# Altium PCB Snail-PCB.PcbDoc
Units mil, origin at the board's own origin, x right, y up, seen from the top; angles counter-clockwise.
Board outline 1496.06 x 944.88 mil, 2 copper layers (Component Side, Bottom Layer), stack 62.8 mil thick; 16 components, 11 nets, 58 pads, 28 vias.
Unrouted connection lines stored in the file: 5.
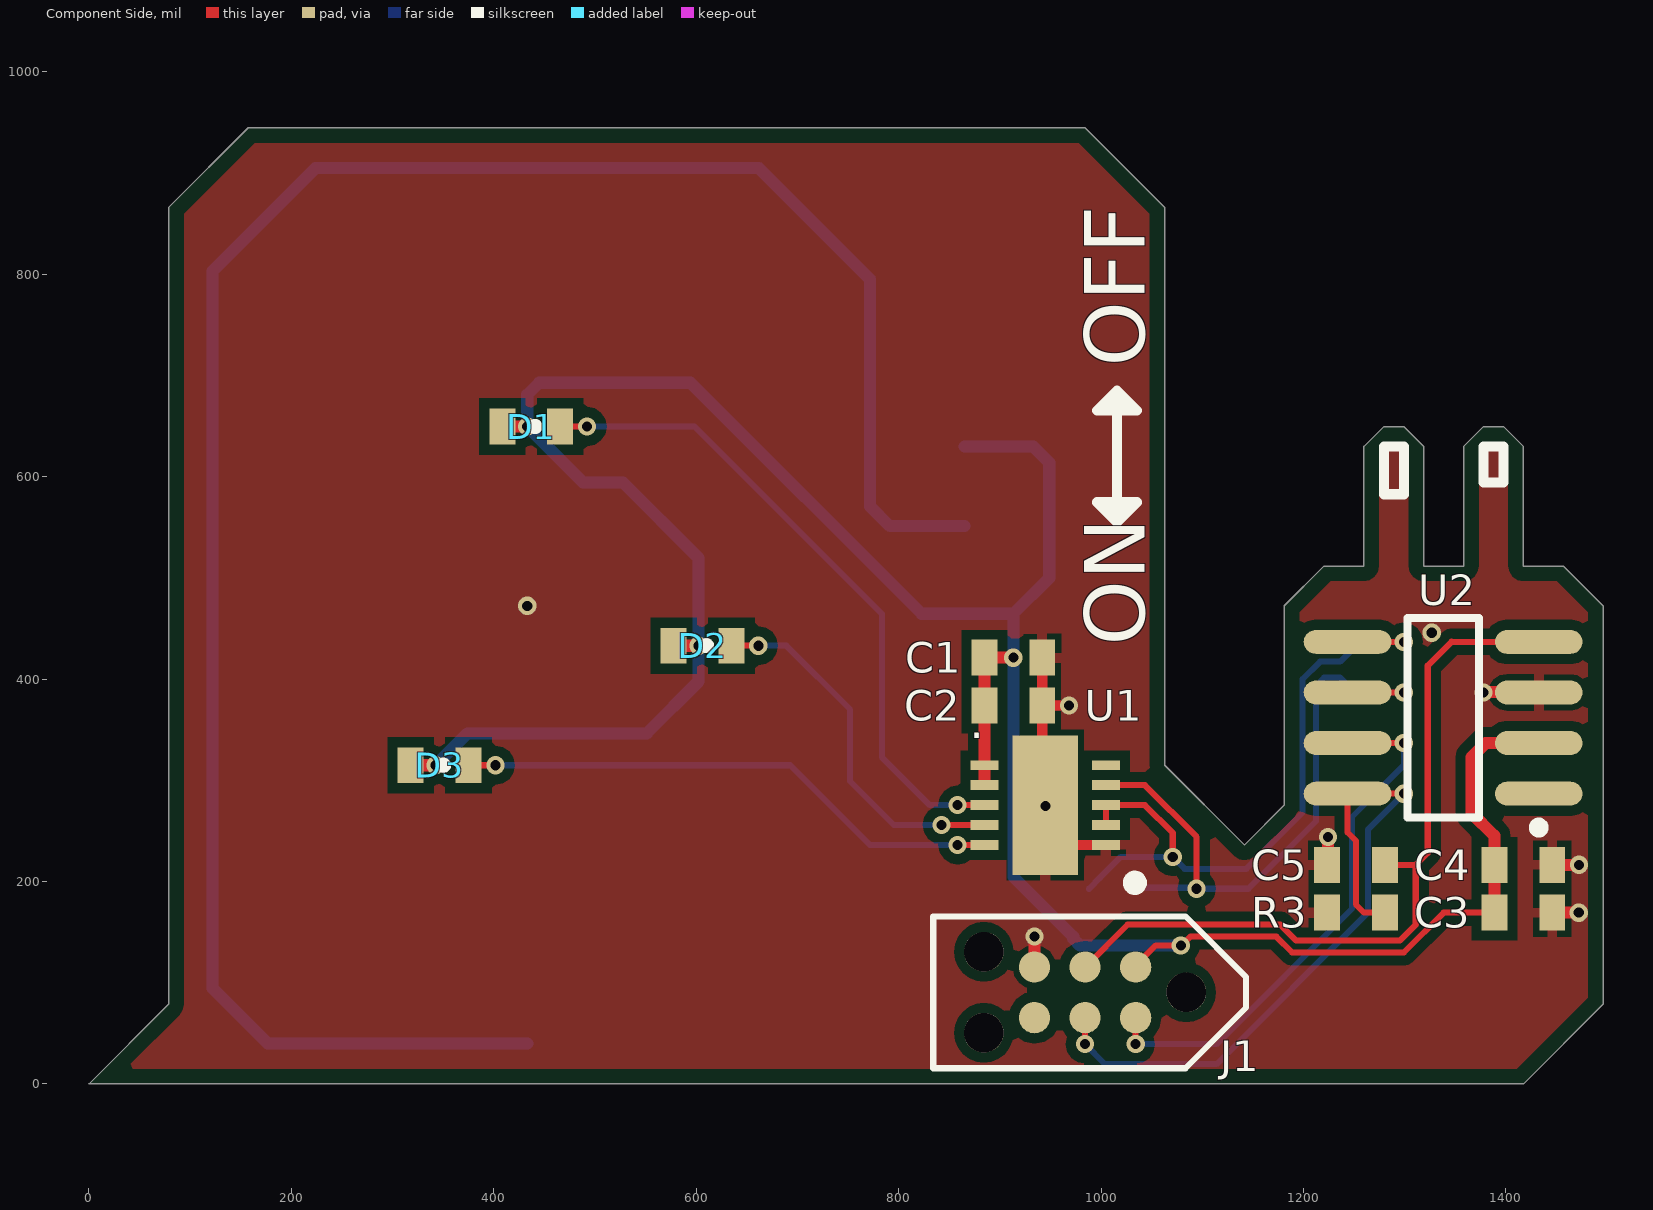
[diagram p0: Component Side view]
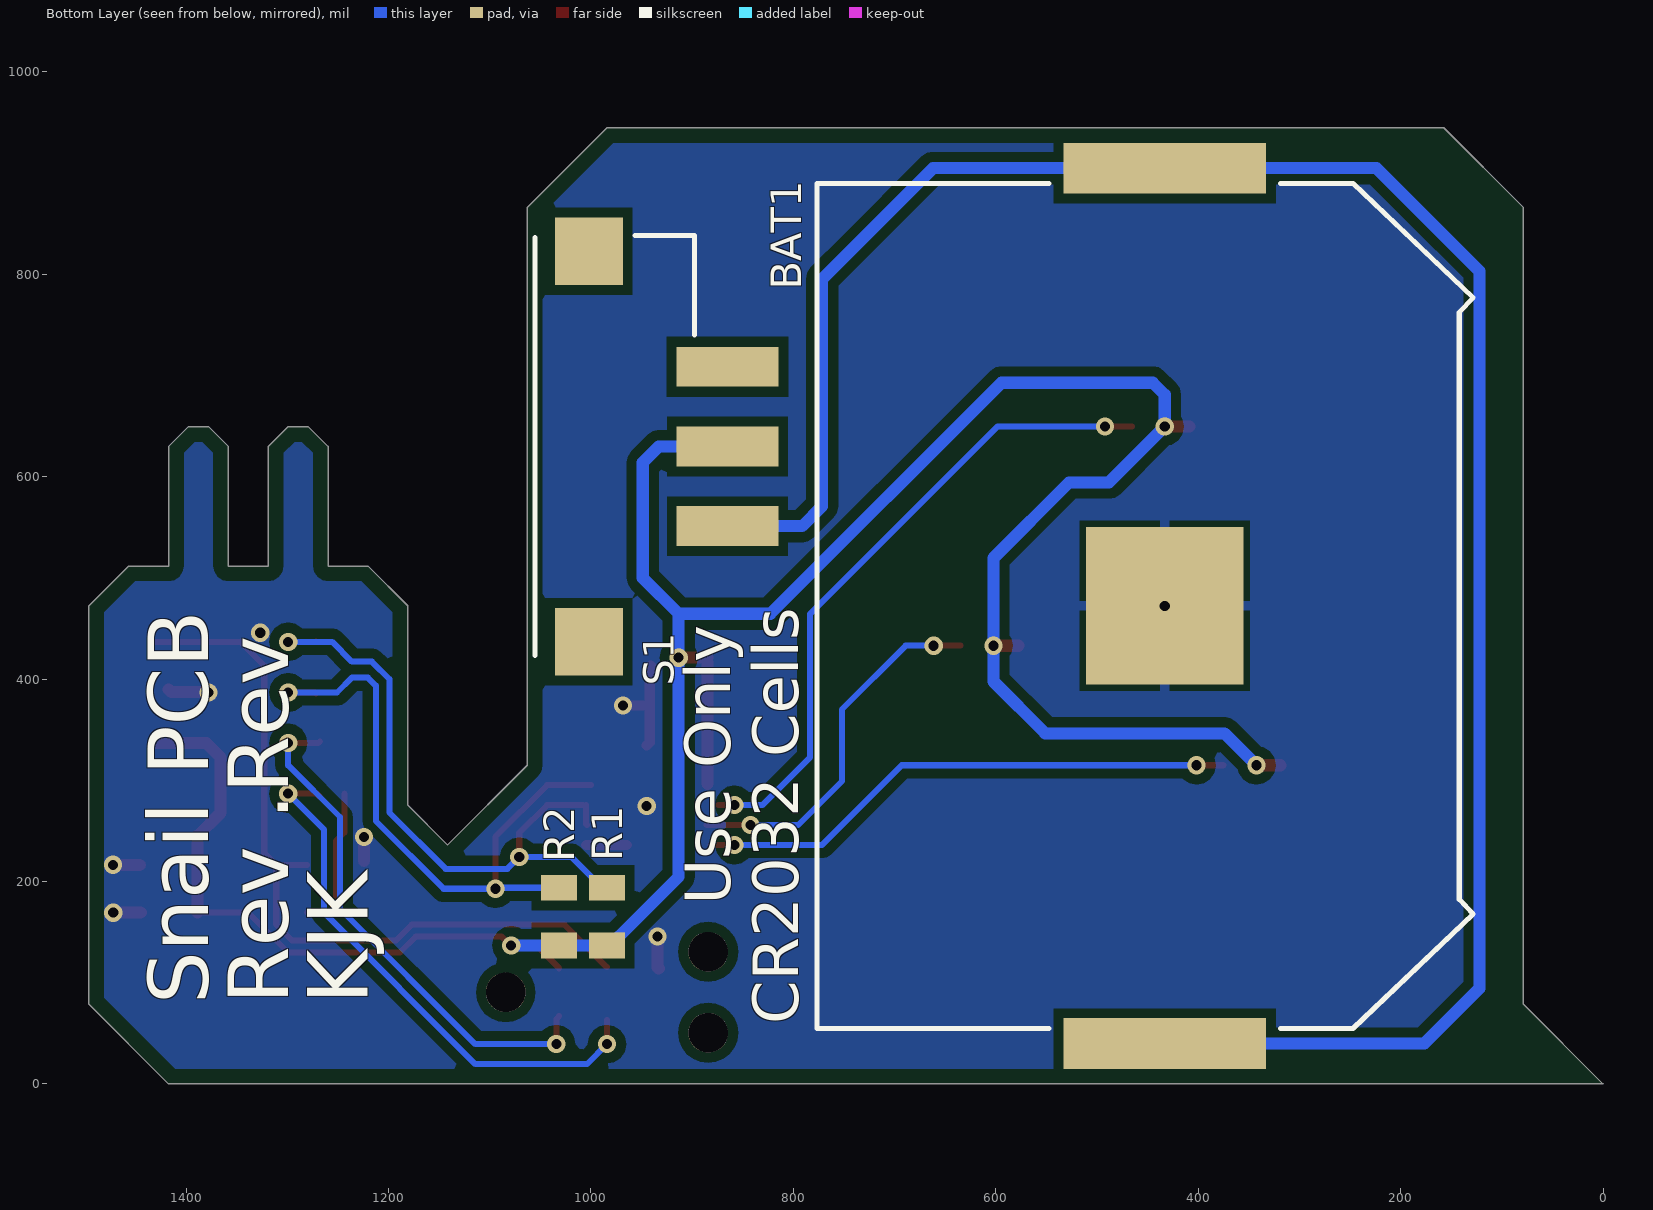
[diagram p1: Bottom Layer view, seen from below]
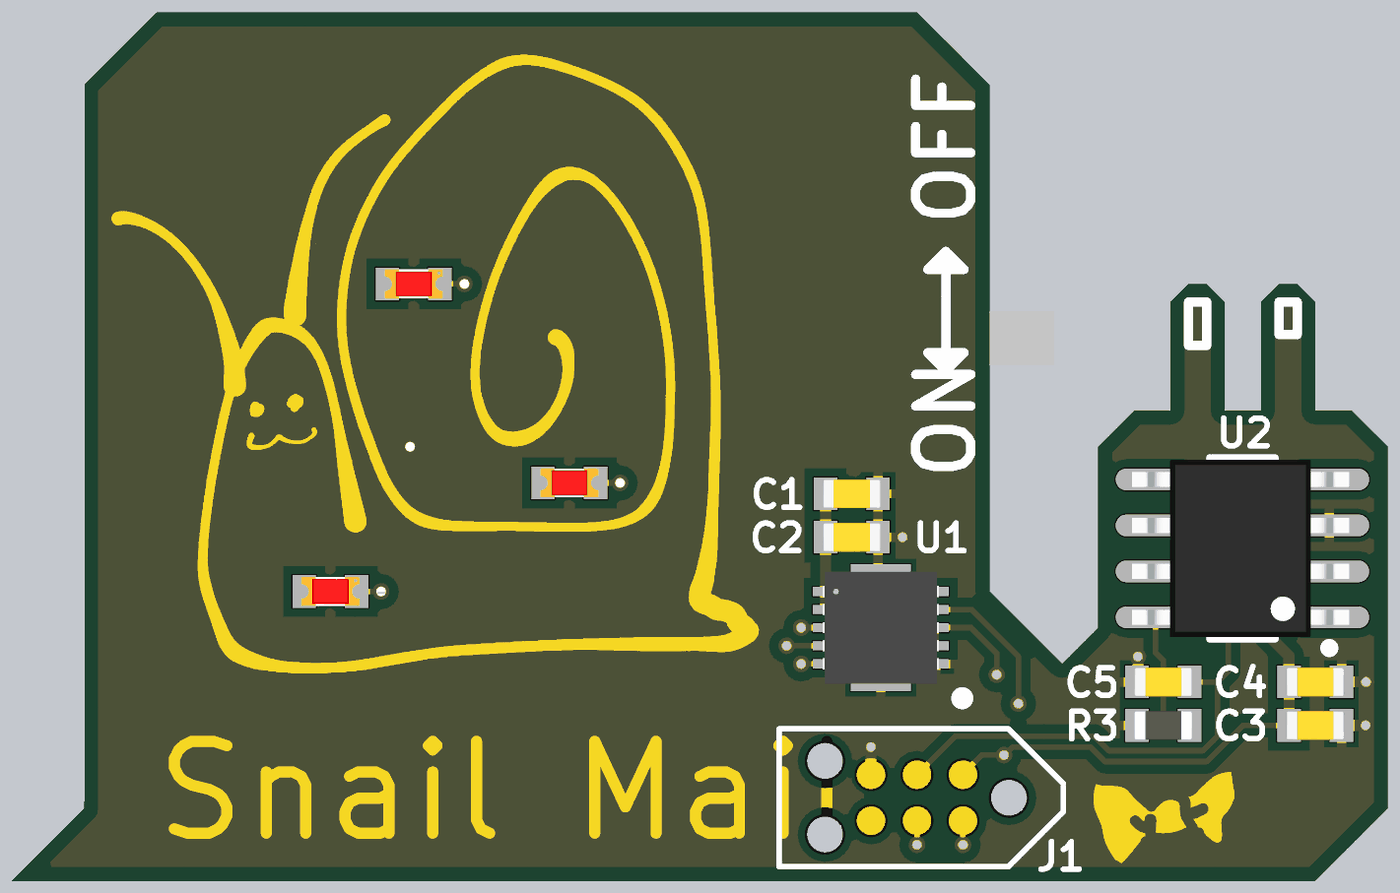
[diagram p2: 3D render of the assembled board from above, using the file's embedded part models]
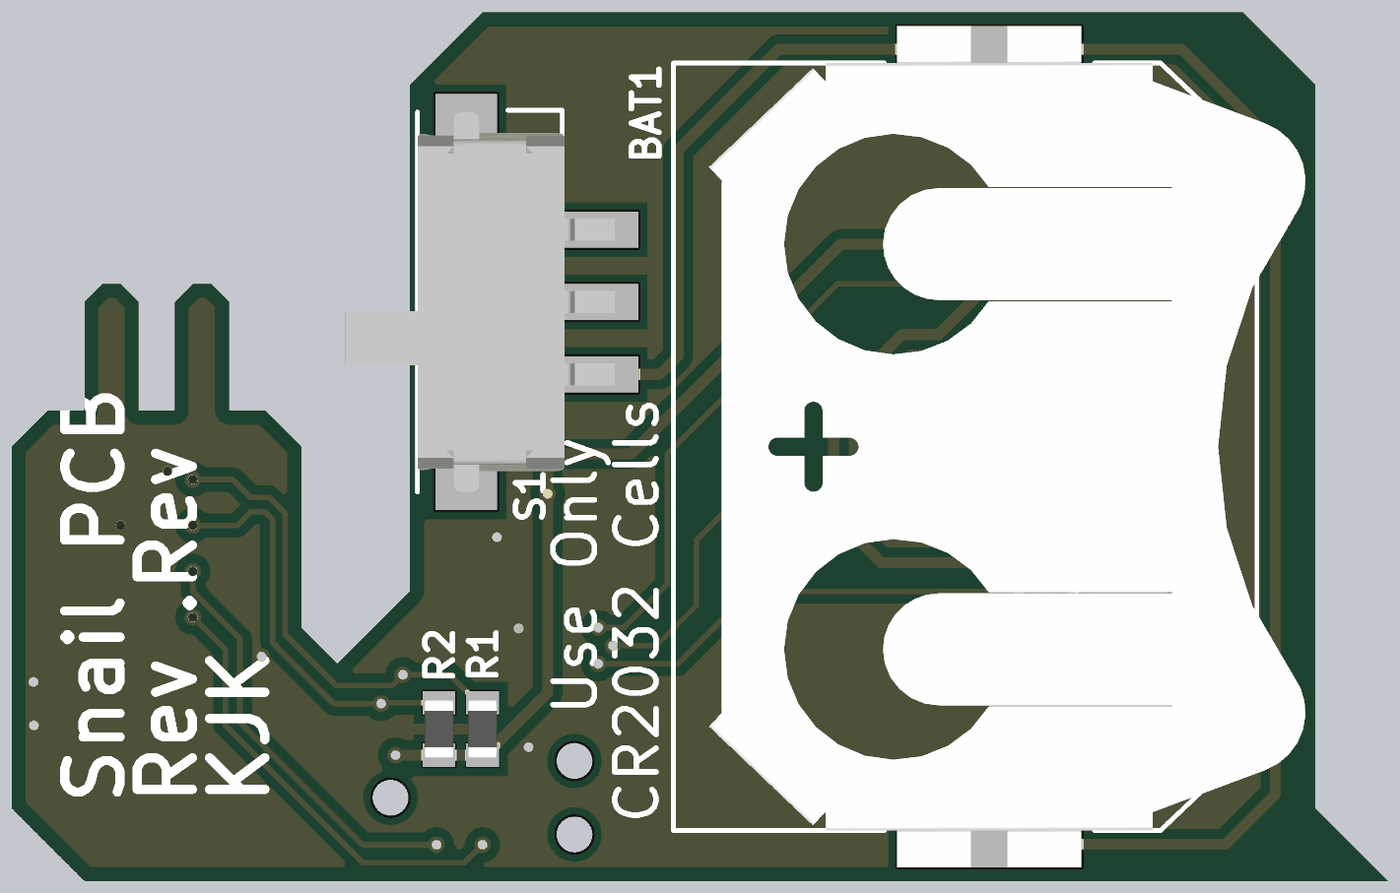
[diagram p3: 3D render of the assembled board from below, using the file's embedded part models]

## Layer stack, top to bottom
Top Solder: solder mask 0.4, Solder Resist, Dk 3.5
Component Side: signal copper 1.4
Dielectric 1: core 60, FR-4, Dk 4.2
Bottom Layer: signal copper 1.4
Solder Side: solder mask 0.4, Solder Resist, Dk 3.5

## Board outline
0,0 78.74,78.74 78.74,866.14 157.48,944.88 984.25,944.88 1062.99,866.14 1062.99,314.96 1141.73,236.22 1181.1,275.59 1181.1,472.44 1220.47,511.81 1259.84,511.81 1259.84,629.92 1279.53,649.61 1299.21,649.61 1318.9,629.92 1318.9,511.81 1358.27,511.81 1358.27,629.92 1377.95,649.61 1397.64,649.61 1417.32,629.92 1417.32,511.81 1456.69,511.81 1496.06,472.44 1496.06,78.74 1417.32,0

## Design rules (kind name [scope] priority, off if disabled: settings)
BoardOutlineClearance [All] p1: gap=15 ignorepadtopadclearanceinfootprint=FALSE
Clearance "Clearance Polygons" [InPolygon] p1: gap=10 ignorepadtopadclearanceinfootprint=FALSE except(0: Arc-Hole Track-Hole SMDPad-Hole THPad-Hole Via-Hole Fill-Hole Poly-Hole Region-Hole Text-Hole)
Clearance [All] p2: gap=5 ignorepadtopadclearanceinfootprint=FALSE except(0: Arc-Hole Track-Hole SMDPad-Hole THPad-Hole Via-Hole Fill-Hole Poly-Hole Region-Hole Text-Hole)
ComponentClearance "HM-TRP & UFL" [InComponent('X1') vs InComponent('U1')] p1: gap=0 collisioncheckmode=3 verticalgap=0 showdistances=FALSE
ComponentClearance [All] p2: gap=1 collisioncheckmode=3 verticalgap=1 showdistances=FALSE
DiffPairsRouting [All] p1: maxlimit=393.7 minlimit=5 mostfreqgap=8 toplayer_minwidth=5 toplayer_maxwidth=15 toplayer_prefwidth=8 bottomlayer_minwidth=5 bottomlayer_maxwidth=15 bottomlayer_prefwidth=8 maxuncoupledlength=500
HoleSize [All] p1: absolutevalues=TRUE maxlimit=265 minlimit=10 maxpercent=80.000 minpercent=20.000
HoleToHoleClearance [All] p1: gap=10 allowstackedmicrovias=FALSE
MinimumAnnularRing [All] p1: minimumring=4
MinimumSolderMaskSliver [All] p1: minsoldermaskwidth=0
PlaneClearance [All] p1: clearance=10
PlaneConnect [All] p1: planeconnectstyle=Relief reliefexpansion=4 reliefentries=4 reliefconductorwidth=6 reliefairgap=6
PolygonConnect "Via connect style" [isVia] p1: connectstyle=Direct reliefconductorwidth=10 reliefentries=4 polygonreliefangle="90 Angle" airgapwidth=10
PolygonConnect [All] p2: connectstyle=Relief reliefconductorwidth=10 reliefentries=4 polygonreliefangle="90 Angle" airgapwidth=6
RoutingCorners [All] p1: cornerstyle=45-Degree minsetback=49.21 maxsetback=49.21
RoutingVias [All] p1: holewidth=12 width=22 viastyle="Through Hole" minholewidth=10 minwidth=18 maxholewidth=100 maxwidth=114
SilkToSilkClearance [All] p1: silktosilkclearance=0
SilkToSolderMaskClearance [IsPad] p1: minsilkscreentomaskgap=1 clearancetoexposedcopper=TRUE
SolderMaskExpansion [All] p1: expansion=2.5 istentingtop=FALSE
Width GND [InNet('GND')] p1: maxlimit=30 minlimit=10 preferedwidth=20
Width Power [InNetClass('Power')] p2: maxlimit=40 minlimit=20 preferedwidth=30
Width 3V3 [InNetClass('3V3')] p3: maxlimit=30 minlimit=10 preferedwidth=20
Width [All] p4: maxlimit=400 minlimit=6 preferedwidth=8
20 further rules are at their usual default settings.

## Classes and differential pairs
component class -: C1 C2 C3 C4 C5 D1 D2 D3 R1 R2 R3

## Components (designator, comment, footprint, x,y, rotation, side; value= is the part's Value field where it differs from the comment)
BAT1 "3034TR" BAT_3034 433.07,472.44 r270 bottom locked
C1 "4.7uF" 0603 913.39,421.26 r0 top
C2 "0.1uF" 0603 913.39,374.02 r180 top
C3 "4.7uF" 0603 1417.32,169.29 r0 top
C4 "0.1uF" 0603 1417.32,216.54 r180 top
C5 "0.1uF" 0603 1251.97,216.54 r0 top
D1 "LED_Red" 0603_LED_Red 437.01,649.61 r0 top
D2 "LED_Red" 0603_LED_Red 606.3,433.07 r0 top
D3 "LED_Red" 0603_LED_Red 346.46,314.96 r0 top
J1 "TC2030-IDC-NL" TC2030-IDC-NL-FP 984.25,90.55 r270 top locked
R1 "10k" 0603 984.25,165.35 r90 bottom
R2 "10k" 0603 1031.5,165.35 r90 bottom
R3 "10k" 0603 1251.97,169.29 r180 top
S1 "SS312SAH4-R" SW_SS312SAH4-R 925.2,629.92 r180 bottom
U1 "IS31FL3193" DFN-10 944.88,275.59 r0 top
U2 "STM32G031J6M6" SOIC-8 1338.58,362.2 r180 top

## Footprints (in the part's own frame and the unit in brackets; to place one, negate y for a bottom-side part, rotate by r counter-clockwise, add the part's x,y. Pads: shape width x height; smd on the part's side, far side on the other; paste and mask are expansions set on the pad)
0603 [mm] "Chip Capacitor; Body 1.6 x 0.8 mm (LxW typ)"
  rect 0.65x0.9 smd mask+0.038: 1(-0.725,0) 2(0.725,0)
  body extent -0.8,-0.4 0.8,0.4, height 0.95
0603_LED_Red [mm]
  rect 0.65x0.9 smd mask+0.038: 1(-0.725,0) 2(0.725,0)
  silkscreen extent 0.04,-0.06 0.16,0.06, body extent -0.8,-0.4 0.8,0.4, height 0.6
BAT_3034 [mm]
  rect 1.27x5.08 smd: 1(-10.985,0) 1(10.985,0)
  rect 3.96x3.96 smd paste-3: 2(0,0)
  silkscreen extent -10.61,-8.73 10.61,7.74, body extent -11.62,-7.75 11.62,8.73, height 4.05
DFN-10 [mm]
  rect 0.7x0.25 smd mask+0.038: 1(-1.525,1) 2(-1.525,0.5) 3(-1.525,0) 4(-1.525,-0.5) 5(-1.525,-1) 6(1.525,-1) 7(1.525,-0.5) 8(1.525,0) 9(1.525,0.5) 10(1.525,1)
  rect 1.65x3.5 smd mask+0.038: 11(0,0)
  body extent -1.6,-1.55 1.6,1.55, height 0.81
SOIC-8 [mm]
  oval 2.2x0.6 smd mask+0.038: 1(-2.387,1.914) 2(-2.387,0.644) 3(-2.387,-0.626) 4(-2.387,-1.896) 5(2.413,-1.896) 6(2.413,-0.626) 7(2.413,0.644) 8(2.413,1.914)
  silkscreen extent -2.51,-2.49 0.91,2.89, body extent -2.93,-2.44 3.07,2.46, height 1.75
SW_SS312SAH4-R [mm]
  rect 2.55x1 smd: 1(1.525,-2) 2(1.525,0) 3(1.525,2)
  rect 1.7x1.7 smd: 4(-1.95,-4.9) 5(-1.95,4.9)
  silkscreen extent -3.3,-5.25 0.7,5.3, body extent -5.29,-5.25 2.16,5.25, height 3
TC2030-IDC-NL-FP [mil]
  round 30.98 smd paste-39.37: 1(-25,50) 2(25,50) 3(-25,0) 4(25,0) 5(-25,-50) 6(25,-50)
  round 39.02 hole 39.02 unplated: ""(-40,-100) ""(0,100) ""(40,-100)
  silkscreen extent -114,-150 75,159

## Part data
BAT1: library part 3034, "BATT RETAINER COIN 20MM 1CEL SMD", Manufacturer="Keystone Electronics", Part Number=3034TR
C1 C3: library part CAP, "CAP CER 4.7UF 16V X5R 0603", Manufacturer="Samsung Electro-Mechanics", Part Number=CL10A475KO8NNNC, Voltage=16V, ClassName=-
C2 C4 C5: library part CAP, "CAP CER 0.1UF 50V X7R 0603", Manufacturer="Samsung Electro-Mechanics", Part Number=CL10B104KB8NFNC, Voltage=50V, ClassName=-
D1 D2 D3: "LED HE RD 0603", Manufacturer=Bivar, Part Number=SM0603HCL, ClassName=-
J1: "CBL PLUG-OF-NAILS 6-PIN", Manufacturer="Tag-Connect LLC", Part Number=TC2030-IDC-NL
R1 R2 R3: library part RES, "RES SMD 10K OHM 1% 1/5W 0603", Manufacturer=Bourns, Part Number=CR0603-FX-1002ELF, ClassName=-
S1: "SWITCH SLIDE SPDT 0.4VA 28V", Manufacturer="NKK Switches", Part Number=SS312SAH4-R
U1: "IC LED DRIVER LINEAR 42MA 10DFN", Manufacturer="Lumissil Microsystems", Part Number=IS31FL3193-DLS2-TR
U2: "IC MCU 32BIT 32KB FLASH 8SO", Manufacturer=STMicroelectronics, Part Number=STM32G031FxP6

## Via types
v1: diameter 18, hole 10, Component Side to Bottom Layer, tented both sides, 28 vias

## Nets (pads, with @x,y where several pads share a name; then routed paths per layer and width w, separated by ;. In a path a pad name is that pad's centre, name@x,y a point inside that pad or via, vN(x,y) a via of type N, cw(c..) or ccw(c..) an arc to the next point about the centre after c; other vN are vias at no path point)
+VBAT: C1.1 C2.2 C3.1 C4.2 D1.1 D2.1 D3.1 J1.1 R1.1 R2.1 S1.2 U1.1 U1.2 U2.2 | length 2803.4
  Component Side w6: J1.1@1031.5,114.17 1054.29,136.96 v1(1078.87,136.96) 1079.68,136.96 1088.38,145.67 1173.23,145.67 1188.98,129.92 1299.21,129.92 1338.58,169.29 C3.1
  Component Side w12: D3.1@318.9,314.96 v1(342.52,314.96) ; D1.1 v1(433.07,649.61) ; D2.1 v1(602.36,433.07) ; U1.2@884.84,296.35 U1.1 ; U1.1@884.84,316.04 C2.2 C1.1@884.84,416.34 ; C1.1 v1@909.45,421.26 ; C3.1 C4.2 1388.64,216.68 1388.64,245.22 1366.14,267.72 1366.14,322.83 1380.16,336.85 U2.2
  Bottom Layer w12: v1(342.52,314.96) 374.02,346.46 551.18,346.46 602.36,397.64 v1(602.36,433.07) 602.36,519.69 527.56,594.49 488.19,594.49 v1(433.07,649.61) 433.07,681.1 444.88,692.91 594.49,692.91 822.83,464.57 913.39,464.57 ; S1.2 933.07,629.92 948.82,614.17 948.82,500 913.39,464.57 ; R2.1 R1.1 979.33,136.81 972.54,143.61 972.54,145.57 913.39,204.72 v1(913.39,421.26) 913.39,464.57 ; R2.1@1032.33,136.96 v1(1078.87,136.96)
GND: BAT1.2 C1.2 C2.1 C3.2 C4.1 C5.1 J1.5 R3.2 U1.6 U1.11 U2.3 | length 297.2
  Component Side w10: C1.2@940.94,413.39 941.93,412.4 C2.1 ; U1.11@944.88,334.65 941.93,337.6 C2.1 ; U1.11@964.57,236.22 U1.6 ; v1(968.5,374.02) C2.1
  Component Side w12: J1.5@933.07,114.17 934.25,115.35 J1.5 v1(934.25,145.67) ; C5.1@1224.41,220.47 v1(1224.41,244.09) ; v1(1377.95,386.85) 1378.31,387.2 1414.76,387.2 U2.3@1417.32,389.76 ; C3.2@1444.88,169.29 C3.2 v1(1472.06,169.29) ; C4.1 v1(1472.44,216.54)
  other v1: 945.01,274.76 1326.77,445.91 433.07,472.44
MCU_SCL: R1.2 U1.7 U1.8 U2.5 | length 644.8
  Component Side w6: U1.7@1003.94,255.91 1004.91,256.88 U1.8 ; U1.8@1007.87,275.59 1043.31,275.59 1070.87,248.03 v1(1070.87,224.41) ; U2.5@1271.65,437.01 1271.81,436.85 v1(1299.21,436.85)
  Bottom Layer w6: R1.2@988.19,192.91 998.97,203.69 1019.68,224.41 v1(1070.87,224.41) 1082.68,212.6 1143.57,212.6 1199.1,268.14 1199.1,399.89 1216.54,417.32 1236.22,417.32 1255.75,436.85 v1(1299.21,436.85)
MCU_SDA: R2.2 U1.9 U2.6 | length 633.9
  Component Side w6: U1.9@1000,295.28 1043.31,295.28 1094.49,244.09 v1(1094.49,192.91) ; U2.6@1271.65,385.83 1272.68,386.85 v1(1299.21,386.85)
  Bottom Layer w6: R2.2 1093.5,193.9 v1(1094.49,192.91) 1145.67,192.91 1212.6,259.84 1212.6,393.7 1220.47,401.57 1236.22,401.57 1250.94,386.85 v1(1299.21,386.85)
NetBAT1_1: BAT1.1 S1.1 | length 2105.5
  Bottom Layer w12: BAT1.1@433.07,39.96 176.57,39.96 122.05,94.49 122.05,803.15 181.1,862.2 223.82,904.92 433.07,904.92 662.01,904.92 740.16,826.77 771.65,795.28 771.65,570.87 791.34,551.18 S1.1
NetD1_2: D1.2 U1.3 | length 646.4
  Component Side w6: D1.2 v1(492.13,649.61) ; v1(858.27,275.59) U1.3@874.02,275.59
  Bottom Layer w6: v1(492.13,649.61) 598.43,649.61 783.46,464.57 783.46,322.83 830.71,275.59 v1(858.27,275.59)
NetD2_2: D2.2 U1.4 | length 365.9
  Component Side w6: D2.2 v1(661.42,433.07) ; v1(842.52,255.91) U1.4@885.83,255.91
  Bottom Layer w6: v1(661.42,433.07) 688.98,433.07 751.97,370.08 751.97,299.21 795.28,255.91 v1(842.52,255.91)
NetD3_2: D3.2 U1.5 | length 539.5
  Component Side w6: D3.2 v1(401.57,314.96) ; v1(858.27,236.22) U1.5@881.89,236.22
  Bottom Layer w6: v1(401.57,314.96) 692.91,314.96 771.65,236.22 v1(858.27,236.22)
NRST: C5.2 J1.3 U2.4 | length 768
  Component Side w6: J1.3 1026.18,157.48 1177.17,157.48 1192.91,141.73 1295.28,141.73 1311.02,157.48 1311.02,216.54 ; C5.2 1311.02,216.54 ; 1346.46,436.85 U2.4 ; 1346.46,437.01 1322.83,413.39 1322.83,228.35 1311.02,216.54
SWCLK: J1.4 R3.1 U2.8 | length 683.4
  Component Side w6: v1(984.25,39.37) J1.4@984.25,62.99 ; U2.8 1243.58,248.54 1251.97,240.16 1251.97,177.17 1259.84,169.29 R3.1 ; U2.8@1267.72,283.46 1271.1,286.85 v1(1299.21,286.85)
  Bottom Layer w6: v1(984.25,39.37) 1003.94,19.68 1114.17,19.68 1263.78,169.29 1263.78,251.42 v1(1299.21,286.85)
SWDIO: J1.2 U2.7 | length 515
  Component Side w6: J1.2@1031.5,66.93 1034.25,64.17 v1(1034.25,39.37) ; U2.7@1267.72,338.58 1269.45,336.85 v1(1299.21,336.85)
  Bottom Layer w6: v1(1034.25,39.37) 1114.17,39.37 1248.03,173.23 1248.03,263.78 1299.21,314.96 v1(1299.21,336.85)
pads on no net: J1. J1.6 S1.3 S1.4 S1.5 U1.10 U2.1

## Polygon pours and split planes (outlines as drawn)
GND on Bottom Layer "GND-Bottom" (solid, remove dead copper, pour order 65): 0,0 78.74,78.74 78.74,866.14 157.48,944.88 984.25,944.88 1062.99,866.14 1062.99,314.96 1141.73,236.22 1181.1,275.59 1181.1,472.44 1220.47,511.81 1259.84,511.81 1259.84,629.92 1279.53,649.61 1299.21,649.61 1318.9,629.92 1318.9,511.81 1358.27,511.81 1358.27,629.92 1377.95,649.61 1397.64,649.61 1417.32,629.92 1417.32,511.81 1456.69,511.81 1496.06,472.44 1496.06,78.74 1417.32,0
GND on Component Side "GND-Top" (solid, remove dead copper, pour order 64): 0,0 78.74,78.74 78.74,866.14 157.48,944.88 984.25,944.88 1062.99,866.14 1062.99,314.96 1141.73,236.22 1181.1,275.59 1181.1,472.44 1220.47,511.81 1259.84,511.81 1259.84,629.92 1279.53,649.61 1299.21,649.61 1318.9,629.92 1318.9,511.81 1358.27,511.81 1358.27,629.92 1377.95,649.61 1397.64,649.61 1417.32,629.92 1417.32,511.81 1456.69,511.81 1496.06,472.44 1496.06,78.74 1417.32,0

## Silkscreen, mask and mechanical layers (free items; w line width, h text height)
Top Overlay:
  lines w10: 1003.94,669.29 1019.68,669.29 ; 1011.81,570.87 1027.56,570.87 ; 1015.75,606.3 1015.75,685.04 ; 1015.75,633.86 1015.75,555.12 ; 1015.75,555.12 1035.43,574.8 996.06,574.8 1015.75,555.12 ; 1015.75,685.04 1035.43,665.35 996.06,665.35 1015.75,685.04 ; 1279.53,582.68 1279.53,629.92 1299.21,629.92 1299.21,582.68 1279.53,582.68 ; 1377.95,594.49 1397.64,594.49 1397.64,629.92 1377.95,629.92 1377.95,594.49
  text "OFF" at 1043.31,708.66 h60 r90
  text "ON" at 1043.31,433.07 h60 r90
Bottom Overlay:
  text "Use Only" at 862.2,177.17 h45 r270
  text "KJK" at 1220.47,78.74 h60 r270
  text "Rev .Rev" at 1299.21,78.74 h60 r270
  text "Snail PCB" at 1377.95,78.74 h60 r270
  text "CR2032 Cells" at 795.28,59.06 h45 r270
Top Solder:
  drawing of 12 lines, arcs and shapes, not listed
  text "Snail Mail" at 149.8,51.37 h100
Mechanical 1:
  the board outline again, w10
ASSY_TOP:
  drawing of 322 lines, arcs and shapes, not listed
  text "SH" at 14559.96,11808.37 h100
  text "DWG NO" at 11601.2,11792.06 h100
  text ".DocNumber" at 12256.77,11680.22 h120
  text "2" at -8963.51,11661.01 h200
  text "4" at -456.71,11661.01 h200
  text "8" at 16250.31,11661.01 h200
  text "1" at -13204.77,11654.72 h200
  text "3" at -4711.78,11654.72 h200
  text "5" at 3795.23,11654.72 h200
  text "6" at 8045.12,11654.72 h200
  text "1" at 14756.77,11640.22 h120
  text "REVISION HISTORY" at 12636.77,11389.11 h100
  text "REV" at 11676.77,11150.22 h100
  text "DESCRIPTION" at 13476.77,11150.22 h100
  text "DATE" at 15776.77,11150.22 h100
  text "APPROVED" at 16976.77,11150.22 h100
  text ".Hist1Rev" at 11712.4,10969.11 h100
  text ".Hist1Desc" at 12176.77,10950.22 h100
  text ".Hist1Date" at 15476.77,10950.22 h100
  text ".Hist1Appr" at 16676.77,10950.22 h100
  text "NOTES" at -13723.23,10900 h400
  text ".Hist2Rev" at 11712.4,10748.11 h100
  text ".Hist2Desc" at 12176.77,10729.22 h100
  text ".Hist2Date" at 15476.77,10729.22 h100
  text ".Hist2Appr" at 16676.77,10729.22 h100
  text "1. DIMENSIONING AND TOLERANCING PER ASME Y14.5M-1994" at -13723.23,10600 h200
  text ".Hist3Rev" at 11712.4,10528.11 h100
  text ".Hist3Desc" at 12176.77,10509.22 h100
  text ".Hist3Date" at 15476.77,10509.22 h100
  text ".Hist3Appr" at 16676.77,10509.22 h100
  text "2. INTERPRET PER ASME Y14.100M" at -13723.23,10300 h200
  text "3. ASSEMBLE PER IPC-A-610, CLASS 2" at -13723.23,10000 h200
  text "4. SOLDER PER J-STD-001, CLASS 2. USE LEAD-FREE SOLDER" at -13723.23,9700 h200
  text "5. ALL PARTS SHOWN MAY NOT BE INSTALLED. FOR SCHEMATIC, SEE SEPARATE PARTS LIST" at -13723.23,9400 h200
  text "A" at -14861.01,9154.51 h200
  text "A" at 18142.4,9154.51 h200
  text "6. DATA INCLUDED IN PARENTHESIS IS FOR REFERENCE ONLY" at -13723.23,9100 h200
  text "7. FOR COMPONENTS WITH REFERENCE DESIGNATORS, REFER TO PARTS LIST BY REFERENCE DESIGNATION" at -13723.23,8800 h200
  text "8. ELECTROSTATIC DISCHARGE CONTROL PROGRAM FOR PROTECTION OF ELECTRICAL AND ELECTRONIC" at -13723.23,8500 h200
  text "PARTS, ASSEMBLIES, AND EQUIPMENT SHALL BE PER IPC-610 OR BETTER" at -13723.23,8200 h200
  text "9. THE PCB MATERIAL MANUFACTURER'S RECOMMENDATIONS FOR PCB MATERIAL STORAGE, PRE-PROCESS" at -13723.23,7900 h200
  text "BAKEOUT, PROCESSING AND MATERIAL HANDLING SHALL BE STRICTLY FOLLOWED DURING ALL ASSEMBLY" at -13523.23,7600 h200
  text "PROCESSES. DEVIATION FROM THESE STANDARDS REQUIRES WRITTEN AUTHORIZATION FROM OCEAN OPTICS, INC" at -13523.23,7300 h200
  text "10. MARK LAST 3 DIGITS OF DRAWING NUMBER (-XXX) IN A CLEAR AND LEGIBLE MANNER USING POLYIMIDE BRADY LABEL" at -13823.23,7000 h200
  text "11. MARK DOCUMENT REVISION IN A CLEAR AND LEGIBLE MANNER USING POLYIMIDE BRADY LABEL" at -13823.23,6700 h200
  text "12. ALL PROCESSES AND PROCEDURES SHALL BE ROHS COMPLIANT" at -13823.23,6400 h200
  text "13. COMPLETED CIRCUIT CARD ASSEMBLIES SHALL BE PACKAGED INDIVIDUALLY" at -13823.23,6100 h200
  text "IN STATIC SHIELDING PACKAGING IN ACCORDANCE WITH ANSI/ESD-S-20.20" at -13523.23,5800 h200
  text "B" at -14862.99,3648.25 h200
  text "B" at 18140.42,3648.25 h200
  text "Dimensions in mm" at 13214.57,-1456.69 h250
  text "Scale  4:1" at 10773.62,-1653.54 h500
  text "C" at -14839.98,-1842.84 h200
  text "C" at 18163.43,-1842.84 h200
  text "SEE SEPARATE PARTS LIST." at 7566.77,-6519.78 h400
  text "DFTG" at 9176.77,-6870.89 h100
  text ".NameDftg" at 9696.77,-6870.89 h100
  text ".DateDftg" at 11256.77,-6870.89 h100
  text "UNLESS OTHERWISE SPECIFIED," at 7016.77,-7040.89 h80
  text "MATERIAL:" at 4529.77,-7049.78 h100
  text "ENG" at 9176.77,-7130.89 h100
  text ".NameEng" at 9696.77,-7130.89 h100
  text ".DateEng" at 11256.77,-7130.89 h100
  text "INCHES" at 8436.77,-7179.78 h80
  text "DIMENSIONS ARE IN" at 7016.77,-7180.89 h80
  text "D" at -14849.9,-7342.81 h200
  text "D" at 18153.5,-7342.81 h200
  text "MECH" at 9176.77,-7350.89 h100
  text "*" at 9696.77,-7370.89 h100
  text "*" at 11256.77,-7370.89 h100
  text "TITLE:" at 12791.35,-7450.89 h100
  text "TOLERANCES:" at 7016.77,-7490.89 h100
  text "SEE NOTES" at 4601.77,-7569.78 h100
  text "MFG" at 9176.77,-7610.89 h100
  text "*" at 9696.77,-7610.89 h100
  text "*" at 11256.77,-7630.89 h100
  text ".X +/- 0.1" at 7056.77,-7670.89 h100
  text ".XX +/- 0.01" at 7056.77,-7790.89 h100
  text ".TitleCCA" at 13051.77,-7804.78 h220
  text ".XXX +/- 0.001" at 7056.77,-7910.89 h100
  text ".Title0" at 14914.17,-8178.35 h220
  text "THIRD ANGLE PROJECTION" at 4586.77,-8365.78 h100
  text "ALL SHEETS ARE THE" at 7196.77,-8527.11 h100
  text ".Title1" at 13241.73,-8550 h220
  text "SAME REVISION STATUS" at 7104.27,-8707.11 h100
  text "SIZE" at 12796.77,-8830.89 h100
  text "DRAWING NUMBER" at 13176.77,-8830.89 h100
  text "REV" at 17392.2,-8891.95 h120
  text "D" at 12798.43,-9139.59 h200
  text ".DocNumber" at 13176.77,-9149.78 h260
  text ".Rev" at 17376.77,-9149.78 h200
  text "1" at 16776.77,-9349.78 h100
  text "2" at 17376.77,-9349.78 h100
  text "1:1" at 13326.77,-9359.78 h100
  text "SCALE" at 12774.59,-9366.65 h100
  text "SHEET   OF" at 16156.75,-9375.11 h100
  text "8" at 16466.77,-9789.78 h200
  text "1" at -13198.23,-9799.78 h200
  text "2" at -8963.51,-9838.9 h200
  text "4" at -456.71,-9838.9 h200
  text "3" at -4711.78,-9845.19 h200
  text "5" at 3795.23,-9845.19 h200
  text "6" at 8045.12,-9845.19 h200
  text "7" at 12296.04,-9845.19 h200
Drill Drawing:
  lines w15: -12141.65,-7099.78 -12141.65,-6799.78 ; -11443.83,-7099.78 -11443.83,-6799.78 ; -10098.23,-7099.78 -10098.23,-6799.78 ; -9592.35,-7099.78 -9592.35,-6799.78 ; -12692.52,-7099.78 -8813.55,-7099.78 -8813.55,-6799.78 -12692.52,-6799.78 -12692.52,-7099.78 ; -12692.52,-6949.78 -8813.55,-6949.78 -12692.52,-6949.78
  text "Symbol" at -12602.52,-6904.78 h72
  text "Hit Count" at -12096.65,-6904.78 h72
  text "Finished Hole Size" at -11398.83,-6904.78 h72
  text "Plated" at -10053.23,-6904.78 h72
  text "Hole Type" at -9547.35,-6904.78 h72
ASSY_BOT:
  lines w7.8: -14117.8,11130.22 -7829.8,11130.22 ; -14117.8,11330.22 -7829.8,11330.22 ; -12814.8,11135.22 -12814.59,11550.13 ; -11529.8,11115.22 -11529.8,11550.22 ; -8329.8,10905.22 -8329.8,11550.22 ; -15123.23,-9942 -15123.23,12050.22 ; -15123.23,-9942 18870.2,-9942 ; -15123.23,-9942 18870.2,-9942 ; -15123.23,-9942 -15123.23,12050.22 ; -15123.23,12050.22 18870.2,12050.22 ; -15123.23,12050.22 18870.2,12050.22 ; 18870.2,-9942 18870.2,12050.22 ; 18870.2,-9942 18870.2,12050.22
  lines w23.6: -14880.39,-4199.9 -14130.39,-4199.9 ; -14880.39,6550.06 -14130.39,6550.06 ; -14130.41,11550.02 -14130.41,-9449.87 ; -14130.39,-8699.88 -9010.41,-8699.88 ; -13539.41,-9199.88 -13539.41,-8699.88 ; -12380.41,-9449.87 -12380.41,-9199.88 ; -10880.41,-9824.87 -10880.41,-9449.87 ; -9010.42,-9444.78 -9010.42,-8714.87 ; -7834.59,10880.22 -7834.59,11550.13 ; -6630.42,-9824.87 -6630.42,-9449.87 ; -6630.42,11550.02 -6630.42,11925.02 ; -2380.43,-9824.87 -2380.43,-9449.87 ; -2380.43,11550.02 -2380.43,11925.02 ; 6119.56,-9824.87 6119.56,-9449.87 ; 6119.56,11550.02 6119.56,11925.02 ; 10369.55,-9824.87 10369.55,-9449.87 ; 14619.54,-9824.87 14619.54,-9449.87 ; 14619.54,11550.02 14619.54,11925.02 ; 17869.53,6550.06 18619.53,6550.06 ; 17869.53,11550.13 -14130.91,11550.13 ; 17894.53,-4199.9 18644.53,-4199.9 ; -14130.91,11550.13 -14130.91,10743.95 -14130.91,11550.13 ; -14130.41,-9449.87 17869.53,-9449.87 ; -14130.41,-9449.87 17869.53,-9449.87 ; -14130.41,-9449.87 17869.53,-9449.87 ; -14130.41,-9449.87 17869.53,-9449.87 ; -14130.39,-9199.88 -9010.41,-9199.88 ; -14130.39,-9199.88 -9010.41,-9199.88 ; -14130.39,-9199.88 -9010.41,-9199.88 ; -14130.39,-9199.88 -9010.41,-9199.88 ; -11280.4,11550.02 -11280.4,11930.03 ; -11280.4,11550.02 -11280.4,11930.03 ; -11280.4,11550.02 -11280.4,11930.03 ; -11280.4,11550.02 -11280.4,11930.03 ; -11280.4,11550.02 -11280.4,11930.03 ; -11280.4,11550.02 -11280.4,11930.03 ; -11280.4,11550.02 -11280.4,11930.03 ; -11280.4,11550.02 -11280.4,11930.03 ; -11280.4,11930.03 -7833.8,11930.03 ; -11280.4,11930.03 -8030.41,11930.03 -11280.4,11930.03 ; -11280.4,11930.03 -7833.8,11930.03 ; -10780.4,11550.02 -10780.4,11930.03 ; -10780.4,11550.02 -10780.4,11930.03 ; -10780.4,11550.02 -10780.4,11930.03 ; -10780.4,11550.02 -10780.4,11930.03 ; -7833.8,11930.03 -7833.8,11550.02 -7833.8,11930.03 ; 10369.55,11550.02 10369.55,11925.02 ; 10369.55,11550.02 10369.55,11925.02 ; 10369.55,11550.02 10369.55,11925.02 ; 10369.55,11550.02 10369.55,11925.02 ; 17869.53,-9449.87 17869.53,11242.06 17869.53,-9449.87 ; 17869.53,-9449.87 17869.53,11550.02 ; 17869.53,-9449.87 17869.53,11550.02 ; 17869.53,-9449.87 17869.53,11550.02 ; -14530.4,1020.08 -14530.4,1080.08 -14330.4,1080.08 -14330.4,1150.08 -14130.41,1050.08 -14330.4,950.08 -14330.4,1020.08 -14530.4,1020.08 ; 1769.58,-9649.87 1869.57,-9449.87 1969.57,-9649.87 1899.58,-9649.87 1899.58,-9849.87 1839.57,-9849.87 1839.57,-9649.87 1769.58,-9649.87 ; 1769.58,11750.02 1869.57,11550.02 1969.57,11750.02 1899.57,11750.02 1899.57,11950.02 1839.57,11950.02 1839.57,11750.02 1769.58,11750.02 ; 17869.53,1050.08 18069.54,950.08 18069.54,1020.08 18269.54,1020.09 18269.54,1080.08 18069.54,1080.08 18069.54,1150.08 17869.53,1050.08
  text "SH" at -10813,11808.37 h100
  text "DWG NO" at -7854.24,11792.06 h100
  text ".DocNumber" at -8509.8,11680.22 h120
  text "8" at -12503.34,11661.01 h200
  text "4" at 4203.67,11661.01 h200
  text "2" at 12710.48,11661.01 h200
  text "6" at -4298.15,11654.72 h200
  text "5" at -48.26,11654.72 h200
  text "3" at 8458.75,11654.72 h200
  text "3" at 8458.75,11654.72 h200
  text "1" at 16951.74,11654.72 h200
  text "1" at -11009.8,11640.22 h120
  text "REVISION HISTORY" at -8889.8,11389.11 h100
  text "APPROVED" at -13229.8,11150.22 h100
  text "DATE" at -12029.8,11150.22 h100
  text "DESCRIPTION" at -9729.8,11150.22 h100
  text "REV" at -7929.8,11150.22 h100
  text "SEE SHEET 1" at -8429.8,10950.22 h100
  text "A" at -14395.43,9154.51 h200
  text "A" at 18607.97,9154.51 h200
  text "B" at -14393.45,3648.25 h200
  text "B" at 18609.96,3648.25 h200
  text "C" at -14416.46,-1842.84 h200
  text "C" at 18586.95,-1842.84 h200
  text "Scale  3:1" at 11410.24,-3768.9 h500
  text "D" at -14406.54,-7342.81 h200
  text "D" at 18596.87,-7342.81 h200
  text "REV" at -13645.23,-8891.95 h120
  text ".DocNumber" at -9254.8,-9099.78 h200
  text ".Rev" at -13629.8,-9149.78 h200
  text "2" at -13629.8,-9349.78 h100
  text "SHEET 2 OF" at -12409.78,-9375.11 h100
  text "8" at -12719.8,-9789.78 h200
  text "1" at 16951.77,-9799.78 h200
  text "4" at 4203.67,-9838.9 h200
  text "2" at 12710.48,-9838.9 h200
  text "7" at -8549.08,-9845.19 h200
  text "6" at -4298.15,-9845.19 h200
  text "5" at -48.26,-9845.19 h200
  text "3" at 8458.75,-9845.19 h200
PCB_SHEET1:
  drawing of 741 lines, arcs and shapes, not listed
  text "SH" at 14559.96,11808.15 h100
  text "DWG NO" at 11601.2,11791.84 h100
  text "DWG NO" at 11601.2,11792.06 h100
  text ".DocNumberPCB" at 12256.77,11680 h120
  text "2" at -8963.51,11660.79 h200
  text "4" at -456.71,11660.79 h200
  text "8" at 16250.31,11660.79 h200
  text "1" at -13204.77,11654.5 h200
  text "3" at -4711.78,11654.5 h200
  text "5" at 3795.23,11654.5 h200
  text "6" at 8045.12,11654.5 h200
  text "1" at 14756.77,11640 h120
  text "REVISION HISTORY" at 12636.77,11388.89 h100
  text "REV" at 11676.77,11150 h100
  text "DESCRIPTION" at 13476.77,11150 h100
  text "DATE" at 15776.77,11150 h100
  text "APPROVED" at 16976.77,11150 h100
  text "11" at -23.23,11000 h200
  text "5" at 356.77,11000 h200
  text ".Hist1Rev" at 11712.4,10968.89 h100
  text "LAYER STACKUP:" at 756.77,10950 h400
  text ".Hist1Desc" at 12176.77,10950 h100
  text ".Hist1Date" at 15476.77,10950 h100
  text ".Hist1Appr" at 16676.77,10950 h100
  text "NOTES" at -13723.23,10900 h400
  text ".Hist2Rev" at 11712.4,10749.89 h100
  text ".Hist2Desc" at 12176.77,10731 h100
  text ".Hist2Date" at 15476.77,10731 h100
  text ".Hist2Appr" at 16676.77,10731 h100
  text "1. UNLESS OTHERWISE SPECIFIED, DIMENSIONS, TOLERANCES, AND SURFACE TEXTURE APPLY" at -13723.23,10600 h200
  text ".Hist3Rev" at 11712.4,10528.89 h100
  text ".Hist3Desc" at 12176.77,10510 h100
  text ".Hist3Date" at 15476.77,10510 h100
  text ".Hist3Appr" at 16676.77,10510 h100
  text "AFTER PLATING OR CHEMICAL FILM TREATMENTS, AND PRIOR TO ORGANIC COATINGS." at -13523.23,10300 h200
  text "2. DIMENSIONING AND TOLERANCING PER ASME Y14.5M-1994" at -13723.23,10000 h200
  text "3. PARTS SHALL BE FREE OF BURRS AND SHARP EDGES. BREAK SHARP EDGES .005\" MAX" at -13723.23,9700 h200
  text "Layer" at -44.03,9665 h30
  text "Name" at 166.92,9665 h30
  text "Material" at 642.8,9665 h30
  text "Thickness" at 1078.68,9665 h30
  text "Constant" at 1409.6,9665 h30
  text "Board Layer Stack" at 1700.53,9665 h30
  text "Top Overlay" at 166.92,9605 h30
  text "Top Solder" at 166.92,9545 h30
  text "Solder Resist" at 642.8,9545 h30
  text "0.40mil" at 1078.68,9545 h30
  text "3.5" at 1409.6,9545 h30
  text "1" at -44.03,9485 h30
  text "Component Side" at 166.92,9485 h30
  text "1.40mil" at 1078.68,9485 h30
  text "Dielectric 1" at 166.92,9425 h30
  text "FR-4" at 642.8,9425 h30
  text "60.00mil" at 1078.68,9425 h30
  text "4.2" at 1409.6,9425 h30
  text "4. UNLESS OTHERWISE SPECIFIED, BOARD SHALL MEET THE REQUIREMENTS OF IPC-6011" at -13723.23,9400 h200
  text "2" at -44.03,9365 h30
  text "Bottom Layer" at 166.92,9365 h30
  text "1.40mil" at 1078.68,9365 h30
  text "Solder Side" at 166.92,9305 h30
  text "Solder Resist" at 642.8,9305 h30
  text "0.40mil" at 1078.68,9305 h30
  text "3.5" at 1409.6,9305 h30
  text "Bottom Overlay" at 166.92,9245 h30
  text "A" at -14861.01,9154.29 h200
  text "A" at 18142.4,9154.29 h200
  text "CLASS 2, AND IPC-6012, TYPE 2." at -13523.23,9100 h200
  text "5. MATERIAL: POLYCLAD 370HR OR EQUIVALENT IAW IPC-4101. THIS BOARD IS INTENDED FOR LEAD-FREE" at -13723.23,8800 h200
  text "ASSEMBLY (RoHS COMPLIANT). FLAMMABILITY RATING OF 94V-0 OR BETTER REQUIRED. BOARD MUST BE UL" at -13523.23,8500 h200
  text "RECOGNIZED AND VENDOR SHALL AFFIX UL LISTING DESIGNATION ON PRINTED CIRCUIT BOARD." at -13523.23,8200 h200
  text "A. BASE LAMINATE: WOVEN GLASS BASED EPOXY RESIN." at -13523.23,7900 h200
  text "SEE STACK DETAIL FOR COPPER WEIGHT, SUBSTRATES, AND FINISHED BOARD THICKNESS" at -13273.23,7600 h200
  text "B. BONDING AGENT: PREIMPREGNATED B-STAGE EPOXY CLOTH (GF)" at -13523.23,7300 h200
  text "C. FINISH TO BE DONE USING IMMERSION GOLD (ENIG) 3-6 MICROINCHES OVER NICKEL 100 MICROINCHES MIN." at -13523.23,7000 h200
  text "FULL BODY IMMERSION GOLD ACCEPTED." at -13273.23,6700 h200
  text "OVERALL HEIGHT = 0.xxx +/- 10%" at -338.23,6470.22 h200
  text "D. SILKSCREEN TO BE DONE USING NON-CONDUCTIVE WHITE EPOXY INK. VENDOR MAY VIA CAP OR PLUG VIAS" at -13523.23,6400 h200
  text "TOP AND BOTTOM LAYER COPPER THICKNESS SPECIFIED AFTER PLATING" at -338.23,6195 h200
  text "BEFORE FINAL SOLDERMASK TO AVOID TRIMMING OF SILKSCREEN. SILKSCREEN INK NOT ALLOWED ON ANY" at -13273.23,6100 h200
  text "EXPOSED ETCH. VENDOR TO DETERMINE BEST PROCESS TO ENSURE THIS." at -13273.23,5800 h200
  text "E. SOLDERMASK OVER BARE COPPER FOLLOWED BY PLATING PER LAYER STACKUP." at -13523.23,5500 h200
  text "SOLDERMASK IS TO BE FREE OF SHADED AREAS, AND IS TO BE BLACK, TYPE B1, CLASS 2, IAW IPC-SM-840." at -13273.23,5200 h200
  text "6. FINAL TRACES WIDTHS AND LAND SIZES REPRESENTED BY ARTWORK. THE FINAL" at -13723.23,4900 h200
  text "CONDUCTOR WIDTH SHALL BE +/- 0.001\" OF THE ORIGINAL ARTWORK TRACE. THE PCB" at -13523.23,4600 h200
  text "MANUFACTURER IS DIRECTED TO INFLATE FEATURES IN THE SUPPLIED GERBER FILES, AS" at -13523.23,4300 h200
  text "NECESSARY, TO COMPENSATE FOR THE ETCHBACK IN THE PCB MANUFACTURER'S PROCESS." at -13523.23,4000 h200
  text "7. MANUFACTURER TO INSERT COMPANY LOGO AND DATE CODE IN BOTTOM SILKSCREEN," at -13748.23,3700 h200
  text "B" at -14862.99,3648.02 h200
  text "B" at 18140.42,3648.02 h200
  text "USING PREFERRED METHOD (NON-CONDUCTIVE)." at -13523.23,3400 h200
  text "8. UNLESS OTHERWISE SPECIFIED:" at -13748.23,3100 h200
  text "A. ALL HOLES TO BE CONCENTRIC WITH PAD CENTER WITHIN +/- 0.005\"." at -13523.23,2800 h200
  text "B. ALL HOLE DIAMETERS TO BE WITHIN +/- 0.003\" OF SPECIFIED DIAMETER." at -13523.23,2500 h200
  text "C. PLATED THROUGH HOLE DIAMETERS SPECIFIED AFTER PLATING." at -13523.23,2200 h200
  text "9. FABRICATE AND TEST BOARD, TYPE 2, CLASS 1, LEVEL A, PER IPC-D-275. VENDOR MUST USE IPC D 356 NETLIST" at -13723.23,1900 h200
  text "PROVIDED PRIOR TO BOARD FABRICATION AND REPORT ANY DISCREPANCIES WHEN COMPARED WITH THE GERBERS." at -13523.23,1600 h200
  text "10. INFORMATION IN PARENTHESIS IS FOR REFERENCE ONLY." at -13723.23,1300 h200
  text "11. MAINTAIN CONTROLLED IMPEDANCES:" at -13734.92,971.48 h200
  text "A. HS-USB - Bottom Layer differential pair; 90 ohms differential impedance; Length differences < 25 mils" at -13541.42,698.66 h200
  text "Trace Width = 15.0mils; Inside Gap = 6.3mils. (Microstrip Differential Pair)" at -13298.46,411.2 h200
  text "12. VENDOR IS ALLOWED TO DO THE FOLLOWING:" at -13761.73,90.7 h200
  text "A. FOLLOW BOARD OUTLINE FOR SIZE OF BOARD." at -13541.42,-205.8 h200
  text "B. REMOVE INTERNAL NON FUNCTIONAL PADS." at -13541.42,-502.29 h200
  text "C. ADD TEAR DROPPING" at -13541.42,-798.79 h200
  text "D. REMOVE SOLDERMASK SLIVERS LESS THAN 0.003 TO ENHANCE PRODUCABILITY." at -13541.42,-1095.28 h200
  text "C" at -14839.98,-1843.06 h200
  text "C" at 18163.43,-1843.06 h200
  text "Scale  3:1" at 9520.47,-3768.9 h500
  text "DFTG" at 9176.77,-6871.11 h100
  text ".NameDftg" at 9696.77,-6871.11 h100
  text ".DateDftg" at 11256.77,-6871.11 h100
  text "UNLESS OTHERWISE SPECIFIED," at 7016.77,-7041.11 h80
  text "MATERIAL:" at 4529.77,-7050 h100
  text "ENG" at 9176.77,-7131.11 h100
  text ".NameEng" at 9696.77,-7131.11 h100
  text ".DateEng" at 11256.77,-7131.11 h100
  text "INCHES" at 8436.77,-7180 h80
  text "DIMENSIONS ARE IN" at 7016.77,-7181.11 h80
  text "D" at -14849.9,-7343.04 h200
  text "D" at 18153.5,-7343.04 h200
  text "MECH" at 9176.77,-7351.11 h100
  text "*" at 9696.77,-7371.11 h100
  text "*" at 11256.77,-7371.11 h100
  text "TITLE:" at 12791.35,-7451.12 h100
  text "TOLERANCES:" at 7016.77,-7491.11 h100
  text "SEE NOTES" at 4601.77,-7570 h100
  text "MFG" at 9176.77,-7611.11 h100
  text "*" at 9696.77,-7611.11 h100
  text "*" at 11256.77,-7631.11 h100
  text ".X +/- 0.1" at 7056.77,-7670.89 h100
  text ".XX +/- 0.01" at 7056.77,-7790.89 h100
  text ".TitlePCB" at 13046.77,-7800 h220
  text ".XXX +/- 0.005" at 7056.77,-7910.89 h100
  text ".Title0" at 13223.23,-8186.22 h220
  text "THIRD ANGLE PROJECTION" at 4586.77,-8366 h100
  text "ALL SHEETS ARE THE" at 7196.77,-8527.33 h100
  text ".Title1" at 12926.77,-8550 h220
  text "SAME REVISION STATUS" at 7104.27,-8707.33 h100
  text "SIZE" at 12796.77,-8831.11 h100
  text "DRAWING NUMBER" at 13176.77,-8831.11 h100
  text "REV" at 17392.2,-8892.17 h120
  text "D" at 12798.43,-9139.81 h200
  text ".DocNumberPCB" at 13176.77,-9150 h260
  text ".Rev" at 17376.77,-9150 h200
  text "1" at 16776.77,-9350 h100
  text "1" at 17376.77,-9350 h100
  text "1:1" at 13326.77,-9360 h100
  text "SCALE" at 12774.59,-9366.87 h100
  text "SHEET   OF" at 16156.75,-9375.34 h100
  text "8" at 16466.77,-9790 h200
  text "1" at -13198.23,-9800 h200
  text "2" at -8963.51,-9839.12 h200
  text "4" at -456.71,-9839.12 h200
  text "3" at -4711.78,-9845.41 h200
  text "5" at 3795.23,-9845.41 h200
  text "6" at 8045.12,-9845.41 h200
  text "7" at 12296.04,-9845.41 h200
PCB_SHEET2:
  lines w7.8: -14117.8,11130.22 -7829.8,11130.22 ; -14117.8,11330.22 -7829.8,11330.22 ; -12814.8,11135.22 -12814.59,11550.13 ; -11529.8,11115.22 -11529.8,11550.22 ; -8329.8,10905.22 -8329.8,11550.22 ; -15123.23,-9942 -15123.23,12050.22 ; -15123.23,-9942 18870.2,-9942 ; -15123.23,-9942 18870.2,-9942 ; -15123.23,-9942 -15123.23,12050.22 ; -15123.23,12050.22 18870.2,12050.22 ; -15123.23,12050.22 18870.2,12050.22 ; 18870.2,-9942 18870.2,12050.22 ; 18870.2,-9942 18870.2,12050.22
  lines w23.6: -14880.39,-4199.9 -14130.39,-4199.9 ; -14880.39,6550.06 -14130.39,6550.06 ; -14130.41,11550.02 -14130.41,-9449.87 ; -14130.39,-8699.88 -9010.41,-8699.88 ; -13539.41,-9199.88 -13539.41,-8699.88 ; -12380.41,-9449.87 -12380.41,-9199.88 ; -10880.41,-9824.87 -10880.41,-9449.87 ; -9010.42,-9444.78 -9010.42,-8714.87 ; -7834.59,10880.22 -7834.59,11550.13 ; -6630.42,-9824.87 -6630.42,-9449.87 ; -6630.42,11550.02 -6630.42,11925.02 ; -2380.43,-9824.87 -2380.43,-9449.87 ; -2380.43,11550.02 -2380.43,11925.02 ; 6119.56,-9824.87 6119.56,-9449.87 ; 6119.56,11550.02 6119.56,11925.02 ; 10369.55,-9824.87 10369.55,-9449.87 ; 14619.54,-9824.87 14619.54,-9449.87 ; 14619.54,11550.02 14619.54,11925.02 ; 17869.53,6550.06 18619.53,6550.06 ; 17869.53,11550.13 -14130.91,11550.13 ; 17894.53,-4199.9 18644.53,-4199.9 ; -14130.91,11550.13 -14130.91,10743.95 -14130.91,11550.13 ; -14130.41,-9449.87 17869.53,-9449.87 ; -14130.41,-9449.87 17869.53,-9449.87 ; -14130.41,-9449.87 17869.53,-9449.87 ; -14130.41,-9449.87 17869.53,-9449.87 ; -14130.39,-9199.88 -9010.41,-9199.88 ; -14130.39,-9199.88 -9010.41,-9199.88 ; -14130.39,-9199.88 -9010.41,-9199.88 ; -14130.39,-9199.88 -9010.41,-9199.88 ; -11280.4,11550.02 -11280.4,11930.03 ; -11280.4,11550.02 -11280.4,11930.03 ; -11280.4,11550.02 -11280.4,11930.03 ; -11280.4,11550.02 -11280.4,11930.03 ; -11280.4,11550.02 -11280.4,11930.03 ; -11280.4,11550.02 -11280.4,11930.03 ; -11280.4,11550.02 -11280.4,11930.03 ; -11280.4,11550.02 -11280.4,11930.03 ; -11280.4,11930.03 -7833.8,11930.03 ; -11280.4,11930.03 -8030.41,11930.03 -11280.4,11930.03 ; -11280.4,11930.03 -7833.8,11930.03 ; -10780.4,11550.02 -10780.4,11930.03 ; -10780.4,11550.02 -10780.4,11930.03 ; -10780.4,11550.02 -10780.4,11930.03 ; -10780.4,11550.02 -10780.4,11930.03 ; -7833.8,11930.03 -7833.8,11550.02 -7833.8,11930.03 ; 10369.55,11550.02 10369.55,11925.02 ; 10369.55,11550.02 10369.55,11925.02 ; 10369.55,11550.02 10369.55,11925.02 ; 10369.55,11550.02 10369.55,11925.02 ; 17869.53,-9449.87 17869.53,11242.06 17869.53,-9449.87 ; 17869.53,-9449.87 17869.53,11550.02 ; 17869.53,-9449.87 17869.53,11550.02 ; 17869.53,-9449.87 17869.53,11550.02 ; -14530.4,1020.08 -14530.4,1080.08 -14330.4,1080.08 -14330.4,1150.08 -14130.41,1050.08 -14330.4,950.08 -14330.4,1020.08 -14530.4,1020.08 ; 1769.58,-9649.87 1869.57,-9449.87 1969.57,-9649.87 1899.58,-9649.87 1899.58,-9849.87 1839.57,-9849.87 1839.57,-9649.87 1769.58,-9649.87 ; 1769.58,11750.02 1869.57,11550.02 1969.57,11750.02 1899.57,11750.02 1899.57,11950.02 1839.57,11950.02 1839.57,11750.02 1769.58,11750.02 ; 17869.53,1050.08 18069.54,950.08 18069.54,1020.08 18269.54,1020.09 18269.54,1080.08 18069.54,1080.08 18069.54,1150.08 17869.53,1050.08
  text "SH" at -10813,11808.37 h100
  text "DWG NO" at -7854.24,11792.06 h100
  text ".DocNumberPCB" at -8509.8,11680.22 h120
  text "8" at -12503.34,11661.01 h200
  text "4" at 4203.67,11661.01 h200
  text "2" at 12710.48,11661.01 h200
  text "6" at -4298.15,11654.72 h200
  text "5" at -48.26,11654.72 h200
  text "3" at 8458.75,11654.72 h200
  text "3" at 8458.75,11654.72 h200
  text "1" at 16951.74,11654.72 h200
  text "1" at -11009.8,11640.22 h120
  text "REVISION HISTORY" at -8889.8,11389.11 h100
  text "APPROVED" at -13229.8,11150.22 h100
  text "DATE" at -12029.8,11150.22 h100
  text "DESCRIPTION" at -9729.8,11150.22 h100
  text "REV" at -7929.8,11150.22 h100
  text "SEE SHEET 1" at -8429.8,10950.22 h100
  text "A" at -14395.43,9154.51 h200
  text "A" at 18607.97,9154.51 h200
  text "B" at -14393.45,3648.25 h200
  text "B" at 18609.96,3648.25 h200
  text "C" at -14416.46,-1842.84 h200
  text "C" at 18586.95,-1842.84 h200
  text "Scale  3:1" at 11397.35,-3770.49 h500
  text "D" at -14406.54,-7342.81 h200
  text "D" at 18596.87,-7342.81 h200
  text "REV" at -13645.23,-8891.95 h120
  text ".DocNumberPCB" at -9254.8,-9099.78 h200
  text ".Rev" at -13629.8,-9149.78 h200
  text "2" at -13629.8,-9349.78 h100
  text "SHEET 2 OF" at -12409.78,-9375.11 h100
  text "8" at -12719.8,-9789.78 h200
  text "1" at 16951.77,-9799.78 h200
  text "4" at 4203.67,-9838.9 h200
  text "2" at 12710.48,-9838.9 h200
  text "7" at -8549.08,-9845.19 h200
  text "6" at -4298.15,-9845.19 h200
  text "5" at -48.26,-9845.19 h200
  text "3" at 8458.75,-9845.19 h200

## Panel: embedded boards
"Init-Display.PcbDoc" at 6324.8,-1141.73, 1 rows x 1 columns, spacing 2500 x 1500, rotation 0